# EAGLE board USB Multiplicator (EAGLE 7.6.0)

Size 20 x 45.5 mm. Coordinates in mm from the lower left corner, seen from the top.
Outline: 0,0 20,0 20,45.5 0,45.5 0,0
Copper layers (1*16): Top 0.035mm / dielectric 1.5mm / Bottom 0.035mm
Design rules "default": minimum track width 10mil, minimum drill 24mil, track to track 8mil, track to pad 8mil, pad to pad 8mil, via to via 8mil, smd to smd 8mil, copper to edge 40mil, drill to drill 8mil, minimum pad ring 10mil, minimum via ring 8mil, stop-mask expansion 4mil, vias tented up to drill 0mil, thermal gap 10mil

## Footprints (pad centres in the part's own frame; a part is rotated, then mirrored left to right if it is on the bottom)
C025-030X050 = drill 0.813 pad 1.422 octagon: 1 -1.27,0; 2 1.27,0
1206 = smd 1.6 x 1.803: A -1.422,0; C 1.422,0
R1206 = smd 1.6 x 1.803: 1 -1.422,0; 2 1.422,0
USB-FEMALE-A-PTH = drill 0.9: D+ 5.9,1.3; D- 7.9,1.3; GND 3.4,1.3; VBUS 10.4,1.3 | drill 3: GND@1 13.5,4; GND@2 0.3,4
MOLEX_480371000 = smd 1.2 x 2: 1 3.5,2.6; 2 1,2.6; 3 -1,2.6; 4 -3.5,2.6 | drill 2.5: M1 -5.7,0; M2 5.7,0 | hole 1.1: -2.25,0; 2.25,0

## Placement (x,y rotation side)
C1_100MF  [C025-030X050]  10.2,27 0 top
LED_PWR  [1206]  17.2,6.5 180 top
R_1K  [R1206]  10.5,8.5 180 top
USB_OUT_1  USB  [USB-FEMALE-A-PTH]  6.9,10 90 top
USB_OUT_2  USB  [USB-FEMALE-A-PTH]  6.9,29.5 90 top
USB_OUT_3  USB  [USB-FEMALE-A-PTH]  13.2,24 270 top
USB_OUT_4  USB  [USB-FEMALE-A-PTH]  13.2,43.5 270 top
X1  USB-A  [MOLEX_480371000]  10,2.7 0 top

## Library data of the parts
C1_100MF LED_PWR R_1K X1 = adafruit
USB_OUT_1-USB_OUT_4 = STUNTAZ

## Nets
GND: C1_100MF.1 R_1K.1 USB_OUT_1.GND USB_OUT_2.GND USB_OUT_3.GND USB_OUT_4.GND X1.4
N$5: LED_PWR.C R_1K.2
USB_DMINUS: USB_OUT_1.D+ X1.2
USB_DPLUS: USB_OUT_1.D- X1.3
VCC: C1_100MF.2 LED_PWR.A USB_OUT_1.VBUS USB_OUT_2.VBUS USB_OUT_3.VBUS USB_OUT_4.VBUS X1.1

## Tracks (layer width: path | path; a pad name or v marks a point on that pad's centre or on a via)
GND  (6 unrouted)
N$5  (1 unrouted)
USB_DMINUS  (1 unrouted)
USB_DPLUS  (1 unrouted)
VCC  (6 unrouted)

## Text on the board
tNames: + | GND | +
bNames: PCBv1 - 2017.05 | USB Multiplicator / MadeInTheUSB.net